# Altium PCB Test.PcbDoc
Units mil, origin at the board's own origin, x right, y up, seen from the top; angles counter-clockwise.
Board outline 3937.01 x 2747 mil, 2 copper layers (Top Layer, Bottom Layer); 40 components, 43 nets, 269 pads, 0 vias.
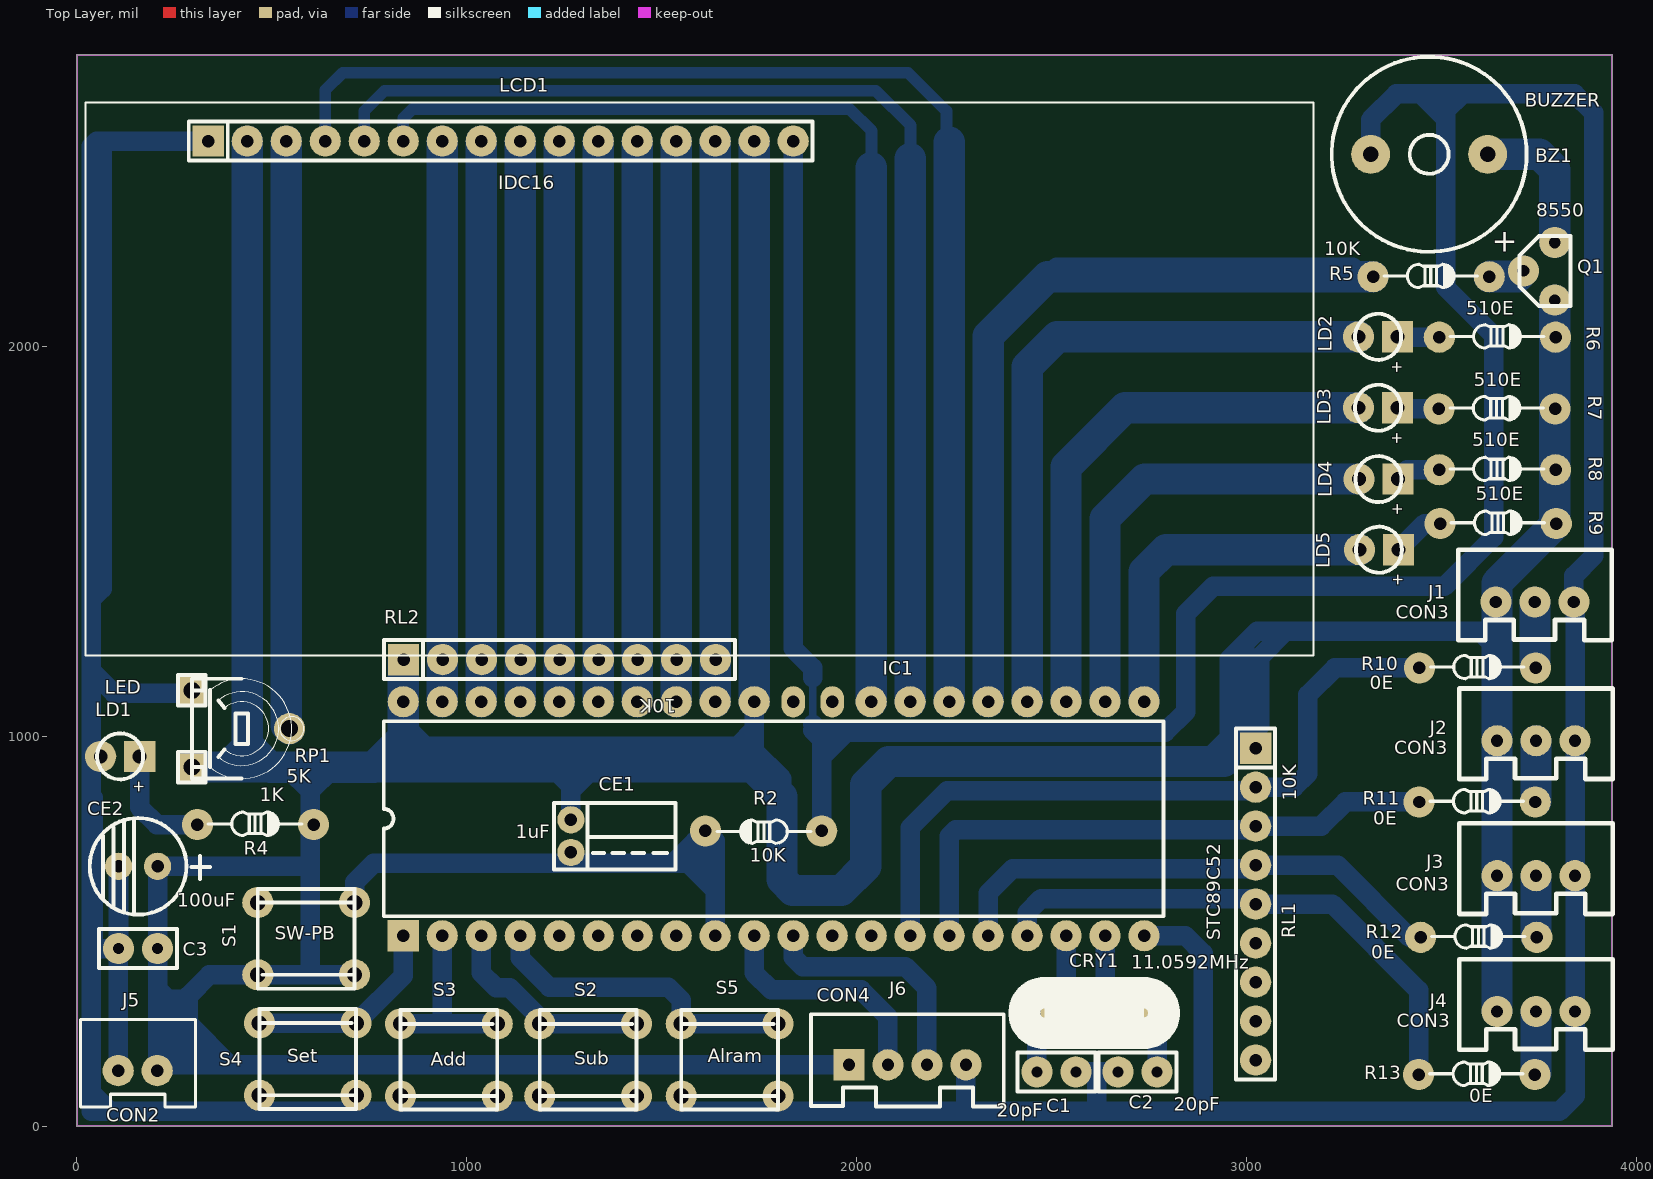
[diagram p0: Top Layer view]
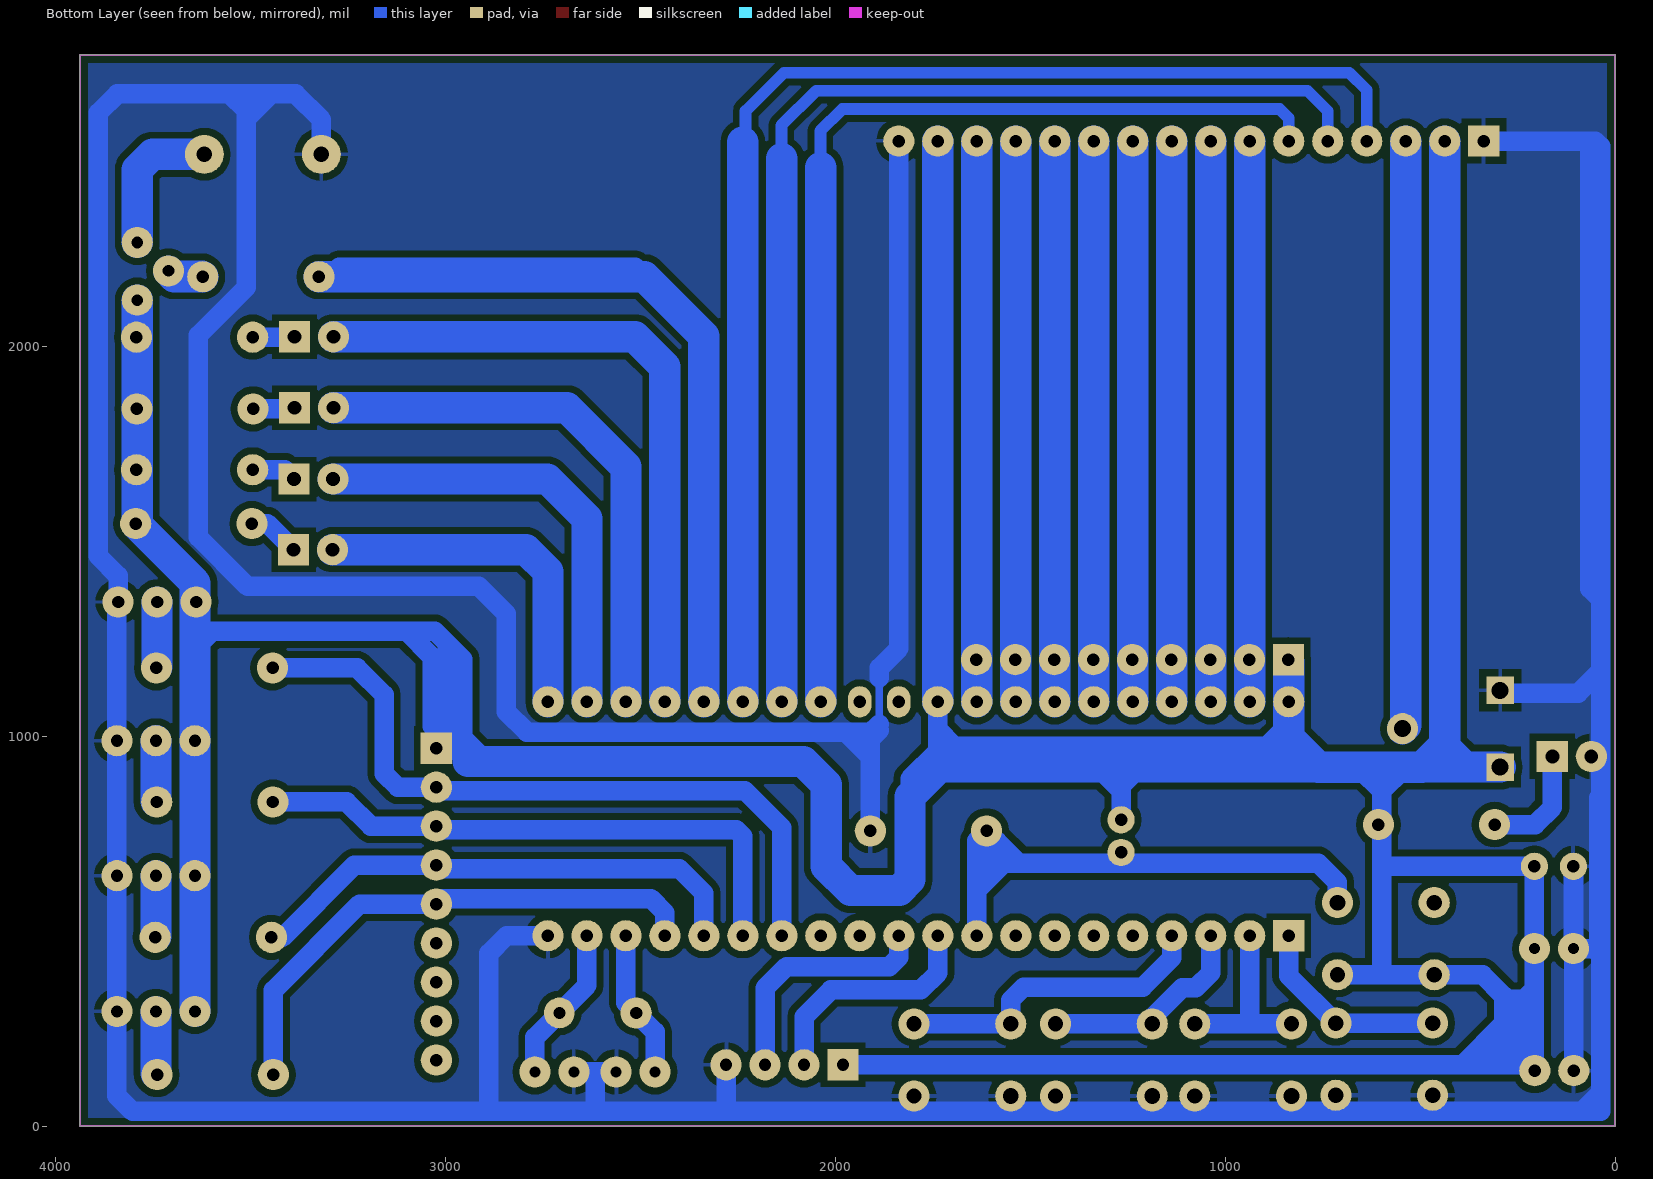
[diagram p1: Bottom Layer view, seen from below]
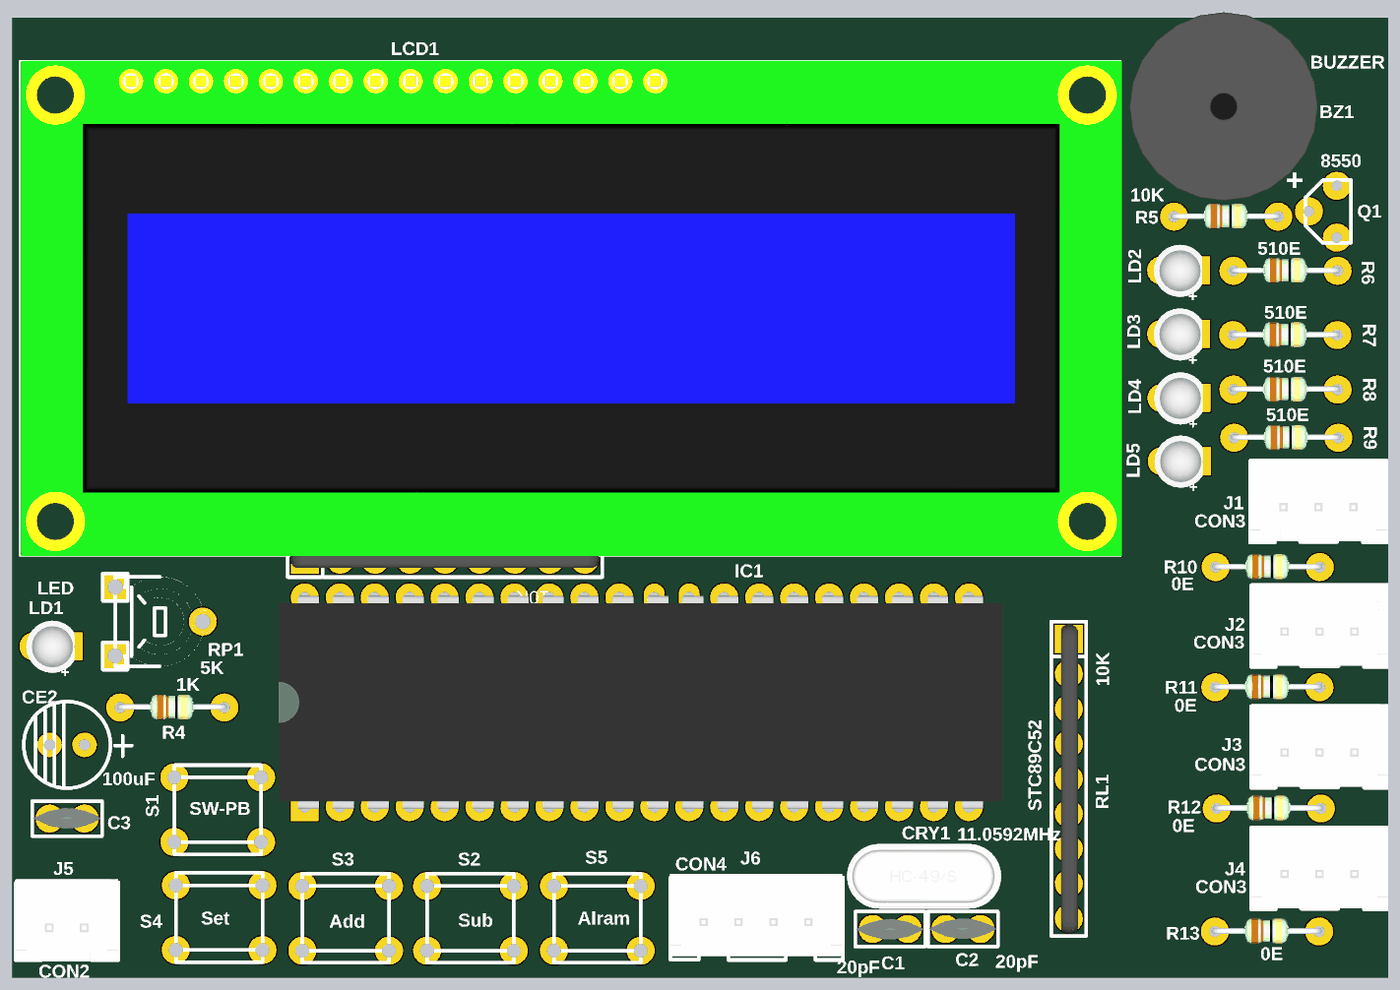
[diagram p2: 3D render of the assembled board from above, using the file's embedded part models]

## Layer stack, top to bottom
Top Layer: signal copper 1.4
Dielectric: dielectric 12.6, FR-4, Dk 4.8
Bottom Layer: signal copper 1.4

## Board outline
0,0 3937.01,0 3937.01,2747 0,2747

## Design rules (kind name [scope] priority, off if disabled: settings)
Clearance [All] p1: gap=10
ComponentClearance [InNet('No Net') vs InNet('No Net')] p1: gap=10 collisioncheckmode=3 verticalgap=10 showdistances=FALSE
FabricationTestpoint [(IsPad And (OnTopLayer Or OnBottomLayer))] p1: side=3 testpointundercomponent=TRUE minsize=40 maxsize=100 preferedsize=60 minholesize=0 maxholesize=40 preferedholesize=32 testpointgrid=1 allowsidetop=TRUE allowsidebottom=TRUE usegrid=TRUE gridtolerance=0.01
HoleSize [All] p1: absolutevalues=TRUE maxlimit=1000 minlimit=1 maxpercent=80.000 minpercent=20.000
HoleToHoleClearance [InNet('No Net') vs InNet('No Net')] p1: gap=10 allowstackedmicrovias=TRUE
MinimumSolderMaskSliver [InNet('No Net') vs InNet('No Net')] p1: minsoldermaskwidth=10
PolygonConnect [All] p1: connectstyle=Relief reliefconductorwidth=10 reliefentries=4 polygonreliefangle="90 Angle"
RoutingVias [All] p1: holewidth=28 width=50 viastyle="Through Hole" minholewidth=28 minwidth=50 maxholewidth=28 maxwidth=50
SilkToSilkClearance [InNet('No Net') vs InNet('No Net')] p1: silktosilkclearance=10
SilkscreenOverComponentPads [InNet('No Net') vs InNet('No Net')] p1: minsilkscreentomaskgap=10
SolderMaskExpansion [All] p1: expansion=4
Width [All] p1: maxlimit=100 minlimit=10 preferedwidth=10
21 further rules are at their usual default settings.

## Components (designator, comment, footprint, x,y, rotation, side; value= is the part's Value field where it differs from the comment)
BZ1 "BUZZER" BUZZER1 3468,2492 r180 top
C1 "20pF" RAD0.1 2512,139 r180 top
C2 "20pF" RAD0.1 2720,139 r0 top
C3 "0.1uF" RAD0.1 157,455 r0 top
CE1 "1uF" RB.1/.1L 1267,743 r0 top
CE2 "100uF" RB.1/.2 157,666 r270 top
CRY1 "11.0592MHz" XTAL1 2609,290 r0 top
IC1 "STC89C52" DIP40 1787,788 r90 top
J1 "CON3" HJ3P2.54 3839,1344 r180 top
J2 "CON3" HJ3P2.54 3842,988 r180 top
J3 "CON3" HJ3P2.54 3842,642 r180 top
J4 "CON3" HJ3P2.54 3842,294 r180 top
J5 "CON2" HJ2P2.54 206,142 r180 top
J6 "CON4" HJ4P2.54 1980,157 r0 top
LCD1 "IDC16" LCD1602A 337,2526 r0 top (schematic designator CON1)
LD1 "LED" LEDF3 111,948 r90 top
LD2 "LED" LEDF3 3337,2024 r90 top
LD3 "LED" LEDF3 3337,1842 r90 top
LD4 "LED" LEDF3 3338,1659 r90 top
LD5 "LED" LEDF3 3339,1478 r90 top
Q1 "8550" TR-EBC 3765,2193 r0 top
R2 "10K" AXIAL0.3 1761,757 r180 top
R4 "1K" AXIAL0.3 458,773 r0 top
R5 "10K" AXIAL0.3 3473,2178 r0 top
R6 "510E" AXIAL0.3 3643,2023 r0 top
R7 "510E" AXIAL0.3 3642,1839 r0 top
R8 "510E" AXIAL0.3 3643,1683 r0 top
R9 "510E" AXIAL0.3 3645,1545 r0 top
R10 "0E" AXIAL0.3 3592,1175 r0 top
R11 "0E" AXIAL0.3 3591,831 r0 top
R12 "0E" AXIAL0.3 3595,484 r0 top
R13 "0E" AXIAL0.3 3590,132 r0 top
RL1 "10K" RES9P 2910,588 r270 top
RL2 "10K" RES9P 1219,1083 r0 top
RP1 "5K" WR1 420,1019 r90 top
S1 "SW-PB" SW-PB4DS 712,388 r180 top
S2 "Sub" SW-PB4DS 1187,262 r0 top
S3 "Add" SW-PB4DS 830,262 r0 top
S4 "Set" SW-PB4DS 468,264 r0 top
S5 "Alram" SW-PB4DS 1550,262 r0 top

## Footprints (in the part's own frame and the unit in brackets; to place one, negate y for a bottom-side part, rotate by r counter-clockwise, add the part's x,y. Pads: shape width x height; smd on the part's side, far side on the other; paste and mask are expansions set on the pad)
AXIAL0.3 [mil]
  round 80 hole 32: 1(-149,0) 2(149,0)
  silkscreen extent -121,-28 119,32, body extent -158,-34 156,37, height 95
BUZZER1 [mil]
  round 100 hole 40: 1(-150,0) 2(150,0)
  silkscreen extent -250,-250 250,250, body extent -268,-271 272,269, height 299
DIP40 [mil]
  rect 80x80 hole 32: 1(-300,950)
  round 80 hole 32: 2(-300,850) 3(-300,750) 4(-300,650) 5(-300,550) 6(-300,450) 7(-300,350) 8(-300,250) 9(-300,150) 10(-300,50) 11(-300,-50) 12(-300,-150) 13(-300,-250) 14(-300,-350) 15(-300,-450) 16(-300,-550) 17(-300,-650) 18(-300,-750) 19(-300,-850) 20(-300,-950) 21(300,-950) 22(300,-850) 23(300,-750) 24(300,-650) 25(300,-550) 26(300,-450) 27(300,-350) 28(300,-250) 31(300,50) 32(300,150) 33(300,250) 34(300,350) 35(300,450) 36(300,550) 37(300,650) 38(300,750) 39(300,850) 40(300,950)
  oval 80x60 hole 32: 29(300,-150) 30(300,-50)
  silkscreen extent -250,-1000 250,1000, body extent -305,-1046 305,1025, height 196
HJ2P2.54 [mm]
  round 0.2 on Top Overlay: 1(-2.5,2.364) 1(-2.5,2.364) 1(-2.5,-3.336) 1(-2.5,-3.336) 1(-0.5,2.364) 1(-0.5,2.364) 1(-0.5,1.536) 1(-0.5,1.536) 1(3.048,1.536) 1(3.048,1.536) 1(3.048,2.364) 1(3.048,2.364) 1(5,2.364) 1(5,2.364) 1(5,-3.336) 1(5,-3.336)
  round 2.032 hole 0.8: 1(0,0) 2(2.54,0)
  silkscreen extent -2.5,-3.34 5,2.36, body extent -2.48,-3.55 5.02,2.45, height 7
HJ3P2.54 [mil]
  round 12 on Top Overlay: 1(-96.85,98.24) 1(-26.38,98.24) 1(-26.38,98.24) 1(-26.38,46.07) 1(-26.38,46.07) 1(48.43,96.27) 1(48.43,96.27) 1(48.43,46.07) 1(48.43,46.07) 1(153.74,46.07) 1(153.74,46.07) 1(153.74,96.27) 1(153.74,96.27) 1(227.56,98.24) 1(227.56,98.24) 1(296.85,98.24)
  round 11.81 on Top Overlay: 1(-96.85,98.24) 1(-96.85,-134.05) 1(-96.85,-134.05) 1(296.85,-134.05) 1(296.85,-134.05) 1(296.85,98.24)
  round 80 hole 31.5: 1(0,0) 2(100,0) 3(200,0)
  silkscreen extent -97,-134 297,98, body extent -95,-141 299,95, height 276
HJ4P2.54 [mil]
  rect 80x80 hole 31.5: 1(0,0)
  round 80 hole 31.5: 2(100,0) 3(200,0) 4(300,0)
  silkscreen extent -97,-107 397,130, body extent -98,-96 394,140, height 276
LCD1602A [mil]
  rect 80x80 hole 32: 1(0,0)
  round 80 hole 32: 2(100,0) 3(200,0) 4(300,0) 5(400,0) 6(500,0) 7(600,0) 8(700,0) 9(800,0) 10(900,0) 11(1000,0) 12(1100,0) 13(1200,0) 14(1300,0) 15(1400,0) 16(1500,0)
  silkscreen extent -315,-1319 2835,98, body extent -312,-1319 2838,98, height 736
LEDF3 [mil]
  rect 80x80 hole 35.43: A(0,-50)
  round 80 hole 35.43: K(0,50)
  silkscreen extent -59,-59 59,59, body extent -76,-67 74,71, height 256
RAD0.1 [mil]
  round 80 hole 28: 1(50,0) 2(-50,0)
  silkscreen extent -100,-50 100,50, body extent -98,-28 98,30, height 217
RB.1/.1L [mil]
  round 70 hole 32: 1(0,42.37) 2(0,-41.37)
  silkscreen extent -43,-85 268,85, body extent -10,-78 273,79, height 157
RB.1/.2 [mil]
  round 70 hole 32: 1(0,50) 2(0,-50)
  silkscreen extent -124,-124 124,185, body extent -124,-124 124,124, height 240
RES9P [mil]
  rect 80x80 hole 32: 1(-381,113)
  round 80 hole 32: 2(-281,113) 3(-181,113) 4(-81,113) 5(19,113) 6(119,113) 7(219,113) 8(319,113) 9(419,113)
  silkscreen extent -431,63 469,163, body extent -424,90 462,139, height 169
SW-PB4DS [mil]
  round 80 hole 39.37: 1(0,0) 1(248.03,0) 2(248.03,-185.04)
  round 80 hole 40: 2(0,-185.04)
  silkscreen extent 0,-220 248,36, body extent -6,-221 254,35, height 236
TR-EBC [mil]
  round 80 hole 30: BASE(-55,0) COLL(25,73) EMIT(25,-75)
  silkscreen extent -65,-90 65,90, body extent -71,-90 65,91, height 315
WR1 [mm]
  rect 1.8x1.8 hole 1.1: 1(2.5,3.181) 2(-2.5,3.181)
  round 2.032 hole 1.1: W(0,-3.181)
  oval 2.9x0.5 on Mech2: ""(0,-0.069)
  silkscreen extent -3.5,-4.11 3.5,4.08
XTAL1 [mm]
  round 2.032 hole 0.8: 1(-2.5,0)
  round 2 hole 0.8: 2(2.5,0)
  silkscreen extent -5.5,-2.25 5.5,2.26, body extent -5.45,-2.26 5.35,2.24, height 3.5

## Part data
C1 C2: library part CAP, "Capacitor"
C3: library part CAP
CE1 CE2: library part ELECTRO1
CRY1: library part CRYSTAL
IC1: library part AT89C51
LCD1: library part CON16
Q1: library part PNP1
R2 R4 R5 R6 R7 R8 R9 R10 R11 R12 R13: library part RES1
RL1 RL2: library part RESL1
RP1: library part Pot1
S2 S3 S4 S5: library part SW-PB

## Nets (pads, with @x,y where several pads share a name; then routed paths per layer and width w, separated by ;. In a path a pad name is that pad's centre, name@x,y a point inside that pad or via, vN(x,y) a via of type N, cw(c..) or ccw(c..) an arc to the next point about the centre after c; other vN are vias at no path point)
BUZZER: IC1.25 R5.1 | length 3933.9
  Bottom Layer w50: IC1.25 2337,2026 2513,2202 3272,2202
  Bottom Layer w80: IC1.25 2337,2026 2489,2178 R5.1
GND: BZ1.2 C1.2 C2.2 C3.2 CE2.2 IC1.20 J1.1@3839,1344 J2.1@3842,988 J3.1@3842,642 J4.1@3842,294 J5.2 J6.4 LCD1.1 LCD1.16 LD1.K R2.1 RP1.1 S2.2 S3.2 S4.2 S5.2 | length 25349.4
  Bottom Layer w20: 1837,1225 1837,1423 ; 1837,1355 1837,1423 ; 1837,2002 1837,1423 ; 1887,1015 1887,1175 ; 3003,1384 3318,1384
  Bottom Layer w50: 37.5,819 37.5,777 ; 41.5,842.5 41.5,627 41.5,443 53.5,455 C3.2 CE2.2@107,660 ; 65,2517 65,1378.5 37.5,1351 37.5,1167.5 94.58,1110.43 RP1.1@286,1110.43 ; J5.2 106,665 CE2.2 ; 323.5,37.5 3790,37.5 ; LCD1.1 51,2526 37.5,2512.5 37.5,777 ; 410,37.5 84.5,37.5 37.5,84.5 37.5,314 ; LCD1.16 1837,2002 1837,1225 1887,1175 1887,1149 ; 1887,1015 1910,992 R2.1 1910,946 1974,1010 2281,1010 ; 1887,1031 1908,1010 2281,1010 ; 2273,37.5 2280,44.5 J6.4 ; C1.2 2615,139 ; 2614,37.5 2615,38.5 2615,139 ; C2.2 2615,139 ; IC1.20 2843,488 2888,443 2888,38.5 2889,37.5 ; BZ1.2 3318,2581 3384,2647 3748,2647 ; 3447,2647 3510,2584 3510,2435 ; 3633,2026 3633,1749 ; 3890,2516 3890,2598 3841,2647 3748,2647 ; 3890,2546 3890,1462 3839,1411 3839,1344 3842,1341 3842,77.5 3802,37.5 37.5,37.5 37.5,314 ; 37.5,314 37.5,777 ; 2281,1010 2791,1010 2844,1063 2844,1314 2914,1384 3507,1384 3633,1510 3633,1749 ; 3510,2435 3510,2604 3553,2647 3748,2647 ; 3510,2435 3510,2151 3633,2028 3633,1749
LCD_D0: IC1.39 LCD1.7 RL2.2 | length 2876
  Bottom Layer w50: IC1.39 LCD1.7
  Bottom Layer w80: IC1.39 LCD1.7
LCD_D1: IC1.38 LCD1.8 RL2.3 | length 2876
  Bottom Layer w50: IC1.38 LCD1.8
  Bottom Layer w80: IC1.38 LCD1.8
LCD_D2: IC1.37 LCD1.9 RL2.4 | length 2876
  Bottom Layer w50: IC1.37 LCD1.9
  Bottom Layer w80: IC1.37 LCD1.9
LCD_D3: IC1.36 LCD1.10 RL2.5 | length 2876
  Bottom Layer w50: IC1.36 LCD1.10
  Bottom Layer w80: IC1.36 LCD1.10
LCD_D4: IC1.35 LCD1.11 RL2.6 | length 2876
  Bottom Layer w50: IC1.35 LCD1.11
  Bottom Layer w80: IC1.35 LCD1.11
LCD_D5: IC1.34 LCD1.12 RL2.7 | length 2876
  Bottom Layer w50: IC1.34 LCD1.12
  Bottom Layer w80: IC1.34 LCD1.12
LCD_D6: IC1.33 LCD1.13 RL2.8 | length 2876
  Bottom Layer w50: IC1.33 LCD1.13
  Bottom Layer w80: IC1.33 LCD1.13
LCD_D7: IC1.32 LCD1.14 RL2.9 | length 4314
  Bottom Layer w50: IC1.32 LCD1.14
  Bottom Layer w80: IC1.32 LCD1.14 IC1.32
LCD_EN: IC1.28 LCD1.6 | length 4342.1
  Bottom Layer w30: LCD1.6 837,2585 860,2608 1982,2608 2038,2552 2038,1368 ; IC1.28 2038,1089 2038,1368 ; 2038,1153 2038,1368
  Bottom Layer w80: IC1.28 2037,2458
LCD_RS: IC1.26 LCD1.4 | length 4763.1
  Bottom Layer w30: LCD1.4 637,2657 681.5,2701.5 2131.5,2701.5 2230,2603 2230,1257 ; 2230,1230 2230,1257 ; IC1.26 2230,1095 2230,1257
  Bottom Layer w80: IC1.26 2237,2523
LCD_RW: IC1.27 LCD1.5 | length 4406.4
  Bottom Layer w30: LCD1.5 737,2603 789,2655 2049,2655 2138,2566 2138,1180.92 IC1.27@2138,1089
  Bottom Layer w80: IC1.27 2137,2481
LED1: IC1.24 LD2.K | length 3481.8
  Bottom Layer w50: IC1.24 2437,1947 2514,2024 LD2.K
  Bottom Layer w80: IC1.24 2437,1947 2514,2024 LD2.K
LED2: IC1.23 LD3.K | length 3112.1
  Bottom Layer w50: IC1.23 2537,1691 2688,1842 LD3.K@3276,1842 ; IC1.23@2537,1098 2537,1390
  Bottom Layer w80: IC1.23 2537,1691 2688,1842 LD3.K
LED3: IC1.22 LD4.K | length 2404.7
  Bottom Layer w50: 2637,1177 IC1.22 2637,1558 2738,1659 LD4.K@3278,1659
  Bottom Layer w80: IC1.22 2637,1558 2738,1659 LD4.K
LED4: IC1.21 LD5.K | length 1814.4
  Bottom Layer w50: IC1.21 2737,1422 2793,1478 LD5.K@3285,1478
  Bottom Layer w80: IC1.21 2737,1422 2793,1478 LD5.K
MCU_RST: CE1.2 IC1.9 R2.2 S1.2@712,573.04 | length 2274.5
  Bottom Layer w50: S1.2@712,573.04 712,625 760.7,673.7 912,673.7 ; 792.3,673.7 987,673.7 1035,673.7 1137,673.7 ; 1597.5,644.5 1612,659 R2.2 ; 1607.5,634.5 1585,657 R2.2@1585,730 ; 1137,673.7 1528.7,673.7 R2.2@1585,730 ; 1137,673.7 1568.3,673.7 1637,605 IC1.9 1637,732 R2.2 ; R2.2@1585,730 R2.2
NetBZ1_1: BZ1.1 Q1.COLL | length 750.3
  Bottom Layer w50: BZ1.1 3751,2492 3790,2453 Q1.COLL
  Bottom Layer w80: BZ1.1 3751,2492 3790,2453 Q1.COLL
NetIC1_1: IC1.1 S4.1 | length 522.1
  Bottom Layer w50: S4.1@468,264 716.03,264 837,384.97 IC1.1
NetIC1_2: IC1.2 S3.1 | length 451
  Bottom Layer w50: S3.1@830,262 S3.1@1078.03,262 ; 937,285 IC1.2
NetIC1_3: IC1.3 S2.1 | length 547.3
  Bottom Layer w50: IC1.3 1037,393 1075,355 1110,355 1203,262 S2.1@1435.03,262
NetIC1_4: IC1.4 S5.1 | length 823.8
  Bottom Layer w50: IC1.4 1137,431 1212,356 1517,356 1550,323 1550,262 S5.1@1798.03,262
NetJ1_2: J1.2 R10.2 | length 336.8
  Bottom Layer w50: R10.2@3739,1177 R10.2 J1.2@3741,1342
  Bottom Layer w80: R10.2@3739,1177 J1.2
NetJ2_2: J2.2 R11.2 | length 312.8
  Bottom Layer w50: R11.2 3742,833 J2.2
  Bottom Layer w80: R11.2@3742,833 J2.2
NetJ3_2: J3.2 R12.2 | length 314.8
  Bottom Layer w50: J3.2 3742,486 R12.2
  Bottom Layer w80: R12.2@3742,486 J3.2
NetJ4_2: J4.2 R13.2 | length 322.2
  Bottom Layer w50: R13.2 3742,135 J4.2
  Bottom Layer w80: R13.2@3742,135 J4.2
NetLCD1_3: LCD1.3 RP1.W | length 3115.8
  Bottom Layer w50: LCD1.3 537,1736 537,1027.22 RP1.W
  Bottom Layer w80: 537,1088 537,1183 ; LCD1.3 537,1183 ; RP1.W 537,1027.22 537,1183
NetLD1_A: LD1.A R4.1 | length 298.2
  Bottom Layer w50: LD1.A 161,817 205,773 R4.1 R4.1@308.35,773.66
NetLD2_A: LD2.A R6.1 | length 106
  Bottom Layer w50: LD2.A@3388,2023 R6.1
NetLD3_A: LD3.A R7.1 | length 103
  Bottom Layer w50: LD3.A@3390,1839 R7.1
NetLD4_A: LD4.A R8.1 | length 115.9
  Bottom Layer w50: LD4.A 3412,1683 R8.1
NetLD5_A: LD5.A R9.1 | length 134.8
  Bottom Layer w50: LD5.A 3456,1545 R9.1
NetQ1_BASE: Q1.BASE R5.2 | length 183
  Bottom Layer w50: R5.2@3622,2195 3708,2195 Q1.BASE
  Bottom Layer w80: R5.2 3695,2178 Q1.BASE
OSC1: C2.1 CRY1.2 IC1.19 | length 404.1
  Bottom Layer w50: IC1.19 2637,360.43 2770,227.43 C2.1
OSC2: C1.1 CRY1.1 IC1.18 | length 441.1
  Bottom Layer w50: C1.1 2462,241.43 2537,316.43 IC1.18 2537,427
RXD: IC1.10 J6.2 | length 607.8
  Bottom Layer w50: IC1.10 1737,393 1781,349 2011,349 2080,280 J6.2
T1: IC1.14 R10.1 RL1.2 | length 2151.4
  Bottom Layer w30: IC1.14 2137,772
  Bottom Layer w50: IC1.14 2137,765 2232,860 RL1.2@3023,860 ; RL1.2 3122,869 3157,904 3157,1106 3226,1175 R10.1
T2: IC1.15 R11.1 RL1.3 | length 1492.7
  Bottom Layer w50: IC1.15 2237,743 2254,760 RL1.3@3023,760 ; RL1.3 3191,769 3253,831 R11.1
T3: IC1.16 R12.1 RL1.4 | length 1320.7
  Bottom Layer w50: IC1.16 2337,597 2400,660 RL1.4@3023,660 ; RL1.4 3233,669 3418,484 R12.1
T4: IC1.17 R13.1 RL1.5 | length 1385.5
  Bottom Layer w50: IC1.17 2437,547 2473,583 RL1.5@3023,583 ; RL1.5 3220,569 3441,348 R13.1
TXD: IC1.11 J6.3 | length 627.7
  Bottom Layer w50: IC1.11 1837,433 1861,409 2125,409 2180,354 J6.3
VCC: C3.1 CE1.1 CE2.1 IC1.31 IC1.40 J1.3 J2.3 J3.3 J4.3 J5.1@206,142 J6.1 LCD1.2 LCD1.15 Q1.EMIT R4.2 R6.2 R7.2 R8.2 R9.2 RL1.1 RL2.1 RP1.2 S1.1 | length 30595
  Bottom Layer w30: J1.3 3639,1389 3790,1540 Q1.EMIT
  Bottom Layer w50: J5.1@206,142 221,157 344,157 ; 207,352 234,325 ; C3.1 CE2.1 ; J5.1@220,144 207,157 CE2.1 ; J5.1@234,161 234,325 ; 273,157 277,161 277,325 ; 277,223 343,157 344,157 ; RP1.2 301.78,913.57 452.58,913.57 ; LCD1.2 437,929.15 438.78,927.37 452.58,913.57 ; S1.1@463.97,388 573,388 ; 598.93,399 598.93,673.7 ; R4.2@598.93,745.93 598.93,673.7 ; 598.93,859 544.35,913.57 378.78,913.57 ; 598.93,860 652.5,913.57 847,913.57 ; 598.93,891 598.93,673.7 ; S1.1@712,388 573,388 ; 799,913.57 837,951.57 IC1.40 ; 837,996 859,974 ; 872,974 990,974 ; 879,932 1635,932 ; 960,974 1040,974 1206,974 1694,974 1737,1017 ; 1226,913.57 1267,872.57 CE1.1 ; 1267,971 CE1.1 ; 1320,913.57 1267,860.57 CE1.1 ; 1563,932 1635,932 ; 1674,932 1737,995 ; 1702,932 1635,932 ; 1737,916 LCD1.15 ; 1737,962 1808,891 1808,632 1836,604 1961,604 2023,666 2023,876 2079,932 2351,932 ; 1808,845 1739.43,913.57 847,913.57 ; J6.1 649,157 ; 2129,932 2351,932 ; 3297,1269 3027,1269 ; 3363,1269 3027,1269 ; J1.3 3639,1389 3792,1542 R8.2 ; J4.3 J1.3@3642,1341 ; 3642,1224 3597,1269 ; R9.2@3791,1542 3791,2022 R6.2 Q1.EMIT@3792,2098 ; CE2.1 591.23,666 598.93,673.7 ; 234,325 277,325 ; 277,325 286,334 ; 286,334 286,263 392,157 649,157 ; 286,334 340,388 573,388 ; 344,157 649,157 ; 378.78,913.57 847,913.57 ; 378.78,913.57 452.58,913.57 ; 2351,932 2648,932 ; 2648,932 2941,932 3034,1025 3034,1203 3100,1269 3597,1269 ; 2648,932 2892,932 2955,995 ; 2955,995 2995,1035 2995,1237 3027,1269 ; 2955,995 2955,1197 3027,1269 ; 3027,1269 3597,1269
  Bottom Layer w80: RP1.2 731,920.57 ; LCD1.2 437,1253 ; RL2.1@837,1191 IC1.40 837,1009 872,974 ; RL2.1 838,997 761.29,920.29 495.29,920.29 437,978.57 437,1088 437,1253 ; IC1.31 LCD1.15 ; 2941,935 2082,935 2023,876 2023,666 1961,604 1836,604 1808,632 1808,845 1732.43,920.57 731,920.57 ; J4.3 3642,1393 3790,1541 Q1.EMIT ; 437,1253 437,971.8 385.78,920.57 731,920.57
pads on no net: IC1.5 IC1.6 IC1.7 IC1.8 IC1.12 IC1.13 IC1.29 IC1.30 J1.1@3542.15,1245.76 J1.1@3542.15,1478.05 J1.1@3611.44,1245.76 J1.1@3685.26,1247.73 J1.1@3685.26,1297.93 J1.1@3790.57,1247.73 J1.1@3790.57,1297.93 J1.1@3865.38,1245.76 J1.1@3865.38,1297.93 J1.1@3935.85,1245.76 J1.1@3935.85,1478.05 J2.1@3545.15,889.76 J2.1@3545.15,1122.05 J2.1@3614.44,889.76 J2.1@3688.26,891.73 J2.1@3688.26,941.93 J2.1@3793.57,891.73 J2.1@3793.57,941.93 J2.1@3868.38,889.76 J2.1@3868.38,941.93 J2.1@3938.85,889.76 J2.1@3938.85,1122.05 J3.1@3545.15,543.76 J3.1@3545.15,776.05 J3.1@3614.44,543.76 J3.1@3688.26,545.73 J3.1@3688.26,595.93 J3.1@3793.57,545.73 J3.1@3793.57,595.93 J3.1@3868.38,543.76 J3.1@3868.38,595.93 J3.1@3938.85,543.76 J3.1@3938.85,776.05 J4.1@3545.15,195.76 J4.1@3545.15,428.05 J4.1@3614.44,195.76 J4.1@3688.26,197.73 J4.1@3688.26,247.93 J4.1@3793.57,197.73 J4.1@3793.57,247.93 J4.1@3868.38,195.76 J4.1@3868.38,247.93 J4.1@3938.85,195.76 J4.1@3938.85,428.05 J5.1@9.15,48.91 J5.1@9.15,273.32 J5.1@86,48.91 J5.1@86,81.53 J5.1@225.68,48.91 J5.1@225.68,81.53 J5.1@304.42,48.91 J5.1@304.42,273.32 RL1.6 RL1.7 RL1.8 RL1.9 RP1. S1.2@463.97,573.04

## Polygon pours and split planes (outlines as drawn)
GND on Bottom Layer "Bottom Layer-No Net" (solid): 0,0 3937.01,0 3937.01,2747 0,2747

## Keep-outs
Keep-Out Layer:
  the board outline again, w5

## Text inside footprints (layer, text, board x,y; h text height)
BZ1: Top Overlay "+" at 3694.7,2311.3 h100 r180
LD1: Top Overlay "+" at 137,887 h50 r270
LD2: Top Overlay "+" at 3363,1963 h50 r270
LD3: Top Overlay "+" at 3363,1781 h50 r270
LD4: Top Overlay "+" at 3364,1598 h50 r270
LD5: Top Overlay "+" at 3365,1417 h50 r270